# EAGLE board 0x6Bottom (EAGLE 7.3.0)
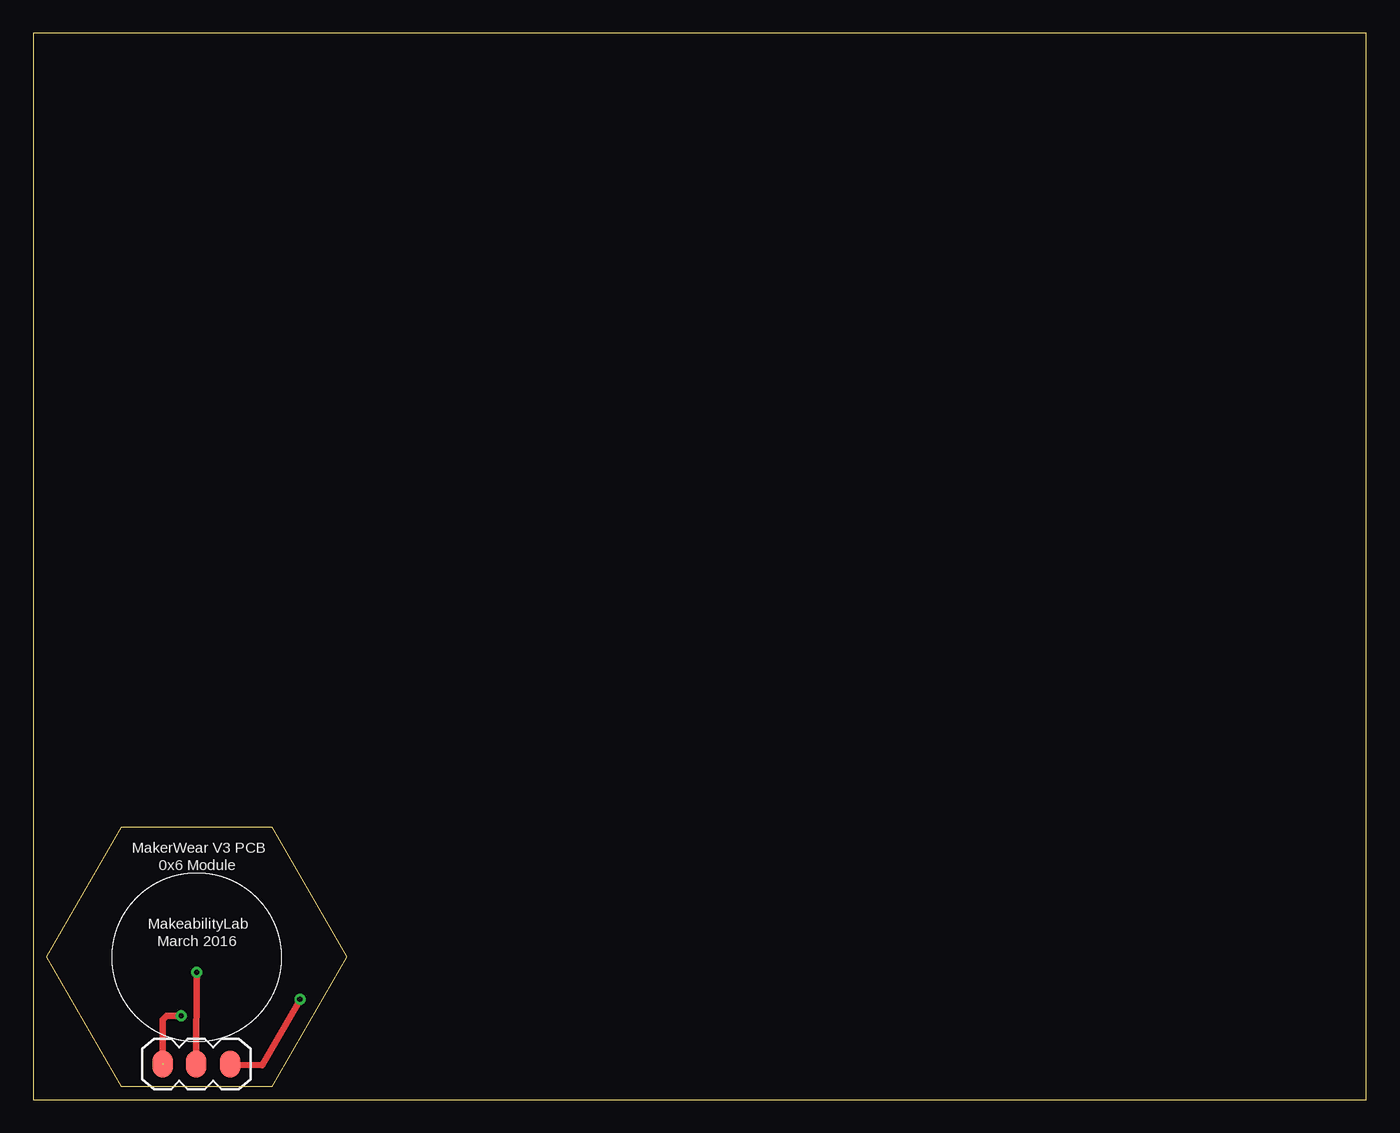
[diagram p0: board, top side]
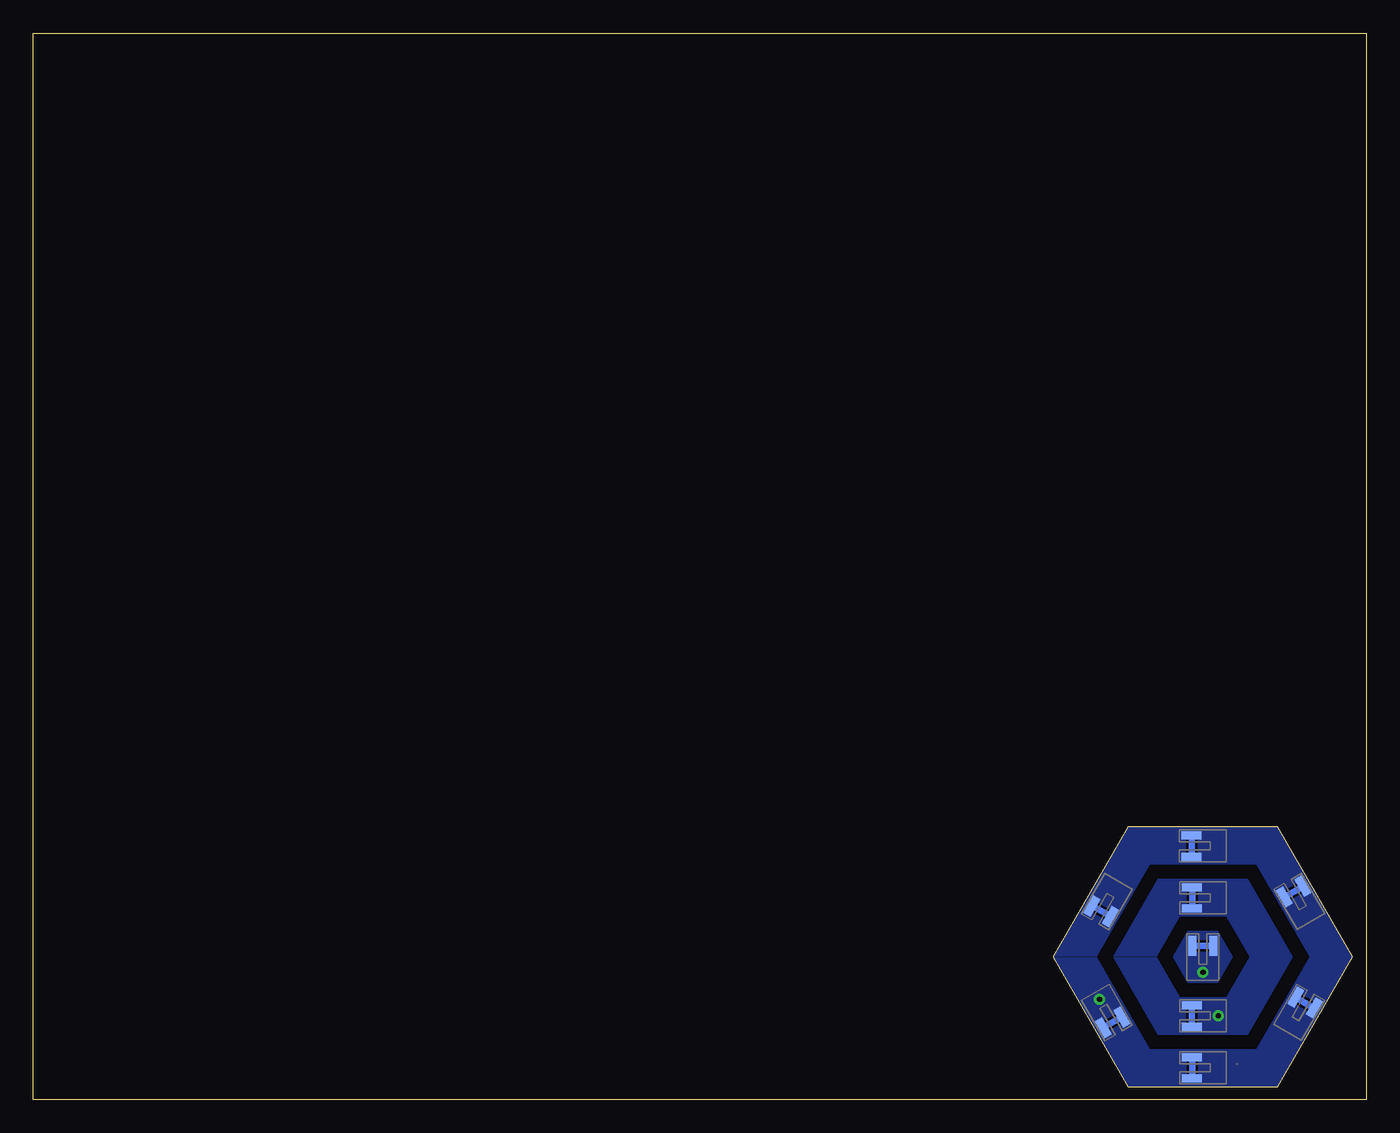
[diagram p1: board, bottom side, seen from below]

Size 100 x 80 mm. Coordinates in mm from the lower left corner, seen from the top.
Outline: 0,0 100,0 100,80 0,80 0,0
Outline: 17.86,20.44 23.49,10.7 17.86,0.96 6.61,0.96 0.99,10.7 6.61,20.44 17.86,20.44
Copper layers (1*16): Top 0.035mm / dielectric 1.5mm / Bottom 0.035mm
Design rules "default *": minimum track width 10mil, minimum drill 24mil, track to track 8mil, track to pad 8mil, pad to pad 8mil, via to via 8mil, smd to smd 8mil, copper to edge 0mil, drill to drill 8mil, minimum pad ring 10mil, minimum via ring 8mil, stop-mask expansion 4mil, vias tented up to drill 0mil, thermal gap 0mil

## Footprints (pad centres in the part's own frame; a part is rotated, then mirrored left to right if it is on the bottom)
SHIELD_FINGER_PKG = smd 1.5 x 0.6 bottom: P1 0.025,0.787; P2 0.025,-0.813
1X03_NO_HOLES = smd 1.524 x 2.032: 1 0,0; 2 2.54,0; 3 5.08,0

## Placement (x,y rotation side)
CON1  SHIELD_FINGER0820  [SHIELD_FINGER_PKG]  19.88,14.15 300 top
CON2  SHIELD_FINGER0820  [SHIELD_FINGER_PKG]  19.04,5.8 240 top
CON3  SHIELD_FINGER0820  [SHIELD_FINGER_PKG]  4.6,7.25 120 top
CON4  SHIELD_FINGER0820  [SHIELD_FINGER_PKG]  13.08,19.03 0 top
CON5  SHIELD_FINGER0820  [SHIELD_FINGER_PKG]  13.06,2.39 0 top
CON6  SHIELD_FINGER0820  [SHIELD_FINGER_PKG]  5.42,15.59 60 top
CON7  SHIELD_FINGER0820  [SHIELD_FINGER_PKG]  12.24,11.52 90 top
CON8  SHIELD_FINGER0820  [SHIELD_FINGER_PKG]  13.06,15.15 0 top
CON9  SHIELD_FINGER0820  [SHIELD_FINGER_PKG]  13.07,6.28 0 top
H1  [1X03_NO_HOLES]  9.69,2.66 0 top

## Library data of the parts
CON1-CON9 = MakerShoe
H1 = SparkFun-Connectors

## Nets
GND: CON7.P1 CON7.P2 H1.2
PWR: CON8.P1 CON8.P2 CON9.P1 CON9.P2 H1.1
SOUT: CON1.P1 CON1.P2 CON2.P1 CON2.P2 CON3.P1 CON3.P2 CON4.P1 CON4.P2 CON5.P1 CON5.P2 CON6.P1 CON6.P2 H1.3

## Tracks (layer width: path | path; a pad name or v marks a point on that pad's centre or on a via)
GND  (via drill 0.4)
  Top 0.5: v12.25,9.55 H1.2
  pour Bottom: 11.11,12.65 13.36,12.65 14.49,10.7 13.36,8.75 11.11,8.75 9.99,10.7
PWR  (via drill 0.4)  (1 unrouted)
  Top 0.5: 9.7,2.7 9.7,6 10,6.3 11.1,6.3 v11.09,6.28
  pour Bottom: 15.72,10.67 13.99,7.68 10.49,7.68 8.74,10.71 10.49,13.74 13.99,13.74 15.72,10.75 18.97,10.75 15.61,16.55 8.86,16.55 5.49,10.71 8.86,4.86 15.61,4.86 18.97,10.67
SOUT  (via drill 0.4)
  Top 0.5: H1.3 14.8,2.6 17.16,2.58 20,7.5 v20.01,7.52
  pour Bottom: 20.22,10.67 16.24,3.78 8.24,3.78 4.24,10.71 8.24,17.64 16.24,17.64 20.22,10.75 23.46,10.75 17.86,20.44 6.61,20.44 0.99,10.7 6.61,0.96 17.86,0.96 23.47,10.67

## Text on the board
tPlace: MakerWear V3 PCB | 0x6 Module | MakeabilityLab | March 2016